# Altium PCB LED.PcbDoc
Units mm, origin at the board's own origin, x right, y up, seen from the top; angles counter-clockwise.
Board outline 20 x 20 mm, 2 copper layers (Top Layer, Bottom Layer), stack 1.671 mm thick; 5 components, 4 nets, 10 pads, 1 vias.
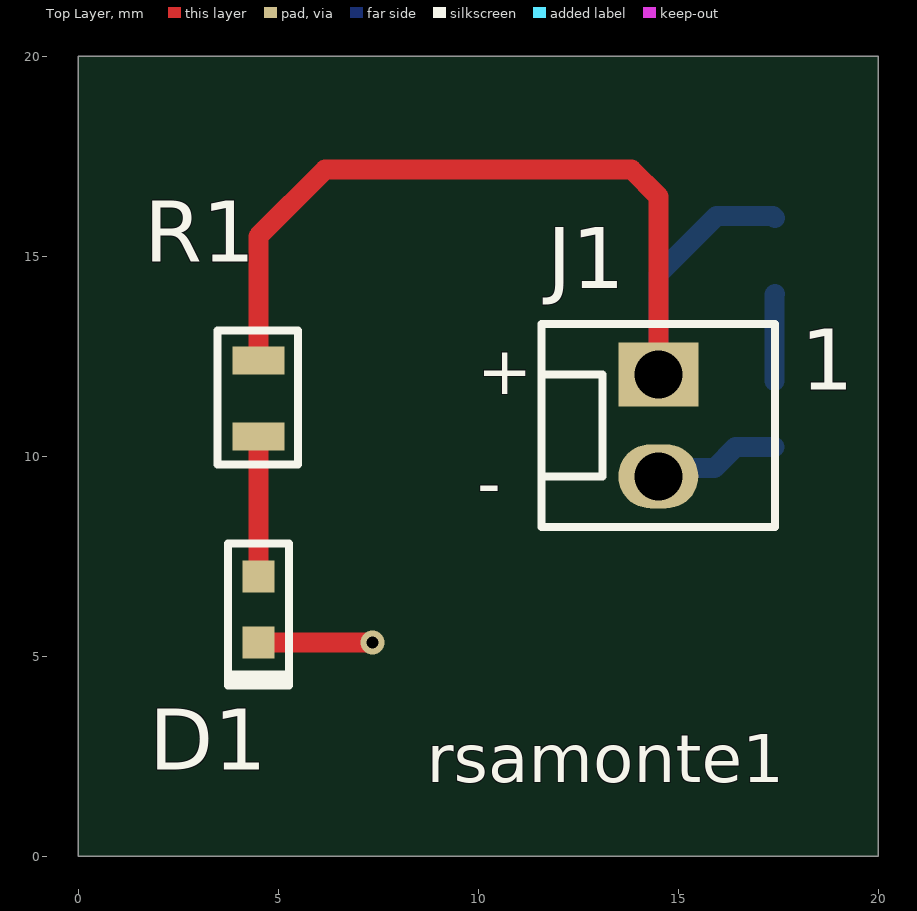
[diagram p0: Top Layer view]
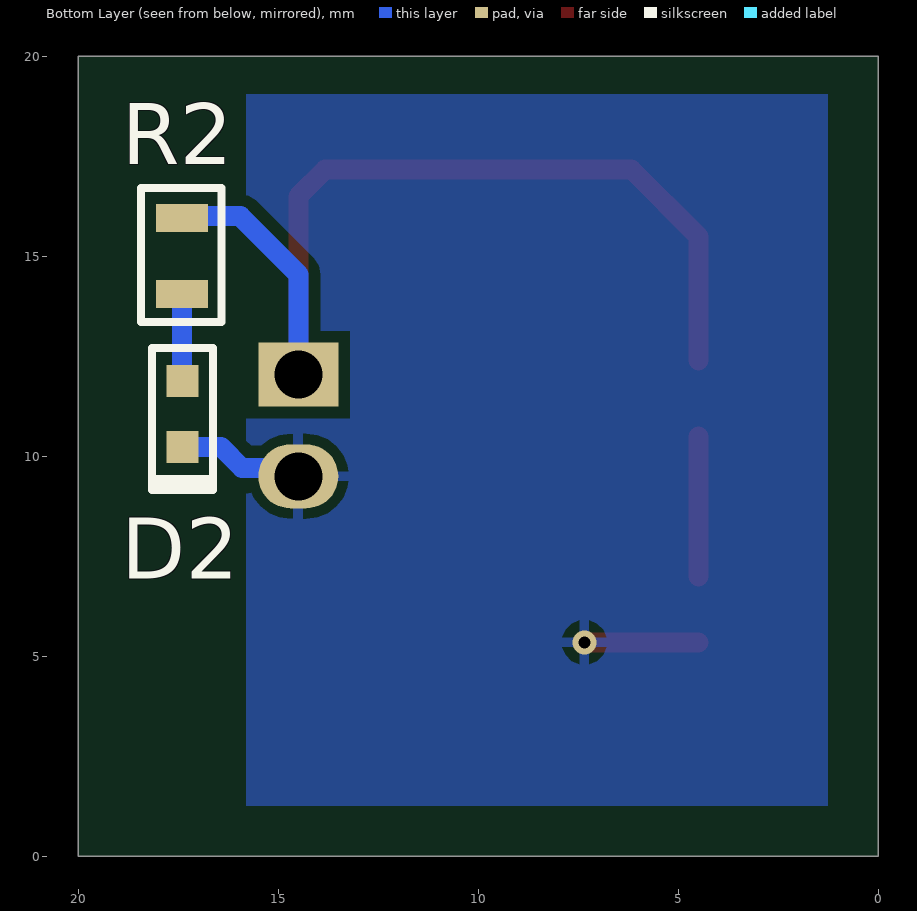
[diagram p1: Bottom Layer view, seen from below]
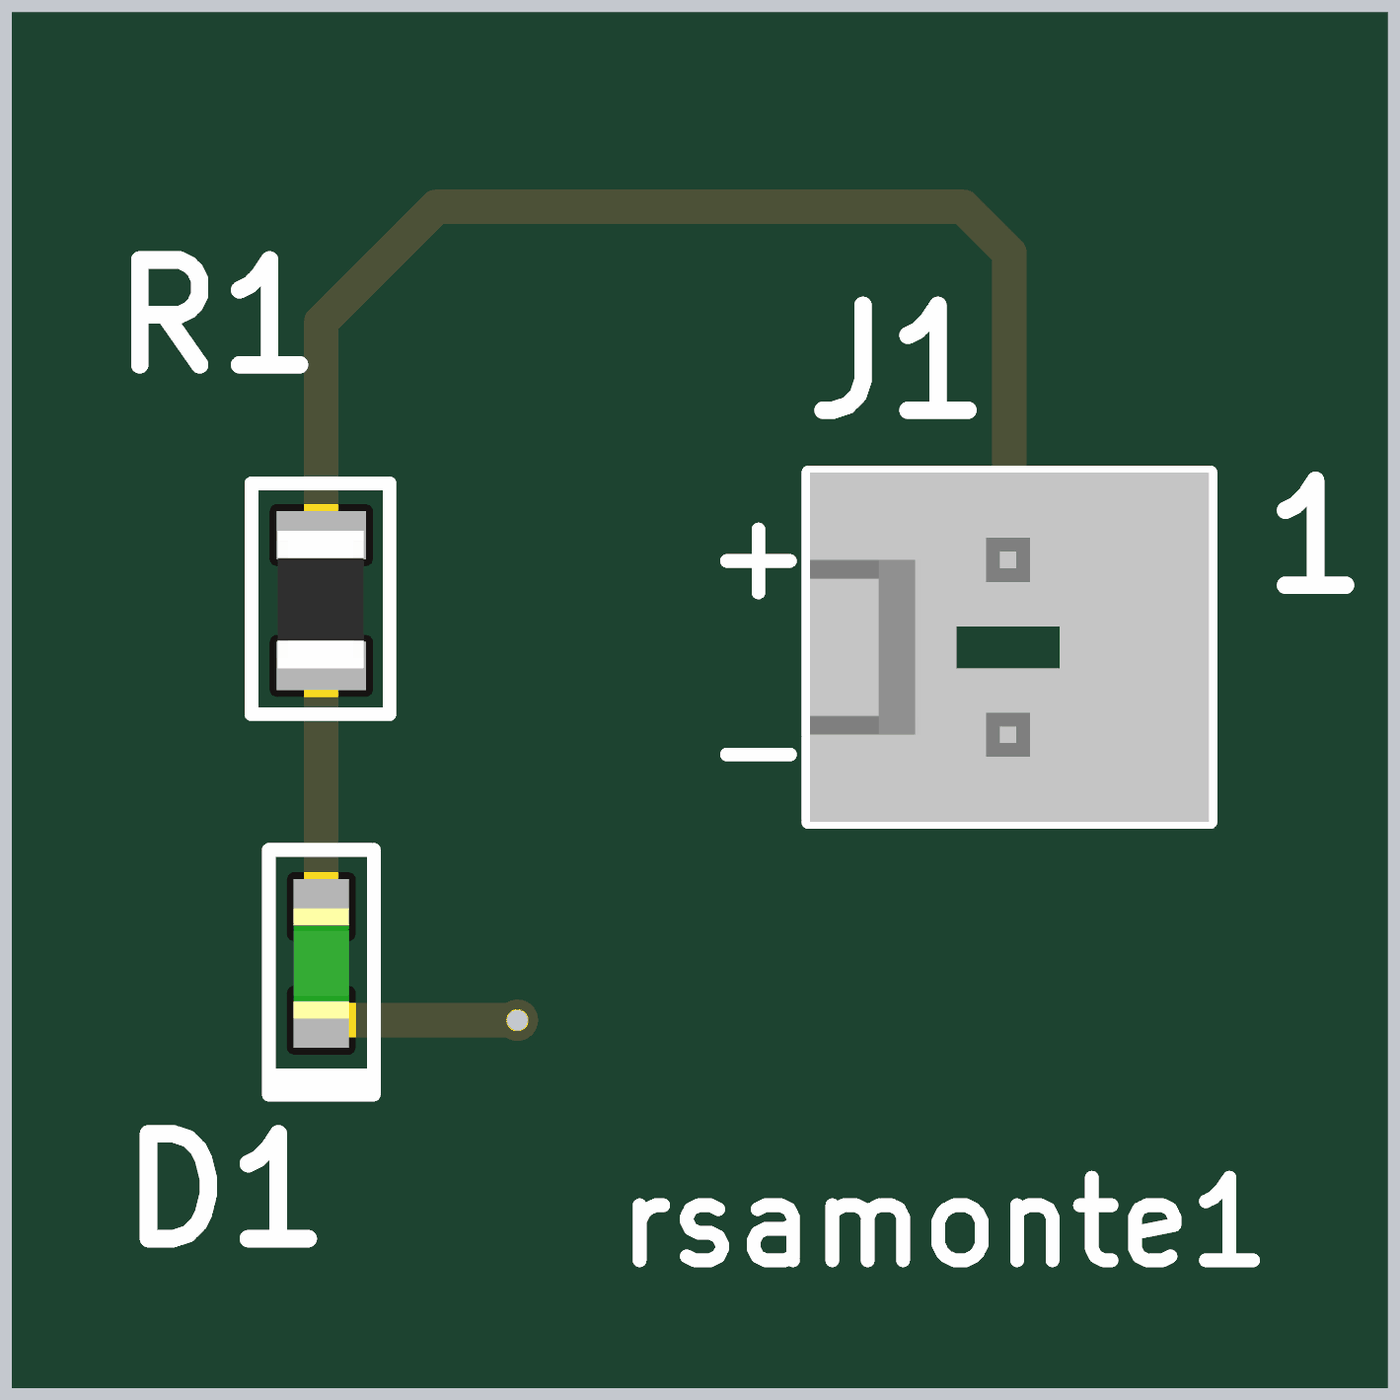
[diagram p2: 3D render of the assembled board from above, using the file's embedded part models]

## Layer stack, top to bottom
Top Solder: solder mask 0.0102, Solder Resist, Dk 3.5
Top Layer: signal copper 0.0356
Dielectric 1: dielectric 1.6, FR-4, Dk 4.8
Bottom Layer: signal copper 0.0356
Bottom Solder: solder mask 0.0102, Solder Resist, Dk 3.5

## Board outline
0,0 20,0 20,20 0,20

## Design rules (kind name [scope] priority, off if disabled: settings)
Clearance [All] p1: gap=0.3 ignorepadtopadclearanceinfootprint=FALSE
PolygonConnect [All] p1: connectstyle=Relief reliefconductorwidth=0.254 reliefentries=4 polygonreliefangle="90 Angle" airgapwidth=0.254
RoutingVias [All] p1: holewidth=0.3 width=0.6 viastyle="Through Hole" minholewidth=0.3 minwidth=0.6 maxholewidth=0.3 maxwidth=0.6
SilkToSolderMaskClearance [IsPad] p1: minsilkscreentomaskgap=0.1 clearancetoexposedcopper=TRUE
SolderMaskExpansion [All] p1: expansion=0.102 istentingtop=FALSE
Width [All] p1: maxlimit=1 minlimit=0.3 preferedwidth=0.5
29 further rules are at their usual default settings.

## Components (designator, comment, footprint, x,y, rotation, side; value= is the part's Value field where it differs from the comment)
D1 "Green" LED0603G 4.5,6.175 r90 top
D2 "Green" LED0603G 17.399,11.061 r90 bottom
J1 "1x2 Header" HEADER1X2 14.5,12.04 r0 top
R1 "360R" R0805 4.5,11.45 r90 top
R2 "360R" R0805 17.412,15.004 r90 bottom

## Footprints (in the part's own frame and the unit in brackets; to place one, negate y for a bottom-side part, rotate by r counter-clockwise, add the part's x,y. Pads: shape width x height; smd on the part's side, far side on the other; paste and mask are expansions set on the pad)
HEADER1X2 [mm]
  rect 2x1.6 hole 1.2: 1(0,0)
  oval 2x1.6 hole 1.2: 2(0,-2.54)
  silkscreen extent -2.92,-3.81 2.92,1.27, body extent -2.9,-3.81 2.9,1.27, height 11.07
LED0603G [mm]
  rect 0.8x0.8 smd: 1(-0.825,0) 2(0.825,0)
  silkscreen extent -1.91,-0.76 1.65,0.76, body extent -0.8,-0.4 0.8,0.4, height 0.4
R0805 [mm]
  rect 0.7x1.3 smd: 1(-0.95,0) 2(0.95,0)
  silkscreen extent -1.65,-0.99 1.7,1.02, body extent -0.98,-0.62 1.02,0.64, height 0.61

## Part data
D1 D2: library part APG1608CGKC/T, "APG1608CGKC/T Green LED; 570 nm 1608 (0603) Clear; Rectangle Lens SMD package", Case Code (Imperial)=0603, Case Code (Metric)=1608, Forward Current=30mA, Forward Voltage=2.1V, Lens Color=Colorless, Manufacturer=Kingbright, Max Operating Temperature=85°C, Min Operating Temperature=-40°C, Package Quantity=2000, Power Dissipation=78mW, Supplier Part Number 1=754-1357-1-ND, Test Current=20mA, Case/Package=0603, Category=LEDs, Color=Green, ComponentLink1Description=https://datasheet.ciiva.com/4689/apg1608cgkc-t-76846-4689371.pdf?src-supplier=Mouser, ComponentLink1URL=https://datasheet.ciiva.com/4689/apg1608cgkc-t-76846-4689371.pdf?src-supplier=Mouser, ComponentLink2Description=https://datasheet.ciiva.com/16223/apg1608cgkc-t-16223186.pdf?src-supplier=Future+Electronics, ComponentLink2URL=https://datasheet.ciiva.com/16223/apg1608cgkc-t-16223186.pdf?src-supplier=Future+Electronics, ComponentLink3Description=https://datasheet.ciiva.com/2113/apg1608cgkc-t-2113933.pdf?src-supplier=Digi-Key, ComponentLink3URL=https://datasheet.ciiva.com/2113/apg1608cgkc-t-2113933.pdf?src-supplier=Digi-Key, ComponentLink4Description=https://datasheet.ciiva.com/2113/apg1608cgkc-t-2113934.pdf?src-supplier=Digi-Key, ComponentLink4URL=https://datasheet.ciiva.com/2113/apg1608cgkc-t-2113934.pdf?src-supplier=Digi-Key, ComponentLink5Description=https://datasheet.ciiva.com/2113/apg1608cgkc-t-2113935.pdf?src-supplier=Digi-Key, ComponentLink5URL=https://datasheet.ciiva.com/2113/apg1608cgkc-t-2113935.pdf?src-supplier=Digi-Key, ComponentLink6Description=https://datasheet.ciiva.com/14604/70062819-14604010.pdf?src-supplier=Allied+Electronics, ComponentLink6URL=https://datasheet.ciiva.com/14604/70062819-14604010.pdf?src-supplier=Allied+Electronics, Dominant Wavelength=570nm, Height=0.28mm, Illumination Color=Green, Lead Free="Lead Free", Length=1.6mm, Lens Style=Clear, Lens Transparency=Clear, Luminous Intensity=50mcd, Manufacturer Part Number=APG1608CGKC/T, Number of LEDs=1, Number of Pins=2, Packaging="Tape and Reel", Parameter 1=Optoelectronic, Power Rating=78mW, Pricing 1="1=0.36000, 10=0.28500, 100=0.12820, 500=0.11576, 1000=0.09508, 2000=0.08268 (USD)", RoHS=Yes, RoHS Compliant=Yes, Series=-, Stock 1=146808, Supplier 1=Digi-Key, Viewing Angle=120°, Width=0.8mm
J1: library part 22-29-2021, "KK 254 Wire-to-Board Header, Vertical, with Friction Lock, 2 Circuits, Gold (Au) Plating", Color=White, Flammability Rating="UL94 V-0", Housing Color=Natural, Manufacturer=Molex, Max Operating Temperature=80°C, Package Quantity=24000, Supplier Part Number 1=WM2744-ND, Voltage Rating (DC)=250V, Category="Headers and Wire Housings", ComponentLink1Description=https://datasheet.ciiva.com/70131/022292021-sd-70131706.pdf?src-supplier=Digi-Key, ComponentLink1URL=https://datasheet.ciiva.com/70131/022292021-sd-70131706.pdf?src-supplier=Digi-Key, Connector Type="Header,Male Pin", Contact Material=Tin, Contact Mating Length=0.295inch, Contact Plating=Gold, Contact Post Length=0.14inch, Contact Shape=Square, Contact Type=-, Fastening Type=Friction, Gender=Male, Glow Wire Compliant=Non-compliant, Halogen Free="Low Halogen", Insulation Color=Natural, Insulation Height=0.461inch, Insulation Material=Nylon, Lead Free="Lead Free", Manufacturer Part Number=22-29-2021, Mount="Through Hole", Number of Positions=2, Number of Rows=1, Packaging=Bulk, Parameter 1=Connector, Pricing 1="1=0.48000, 10=0.40400, 100=0.31400, 1000=0.24671, 5000=0.21680, 10000=0.20185 (USD)", RoHS=Yes, Series=6410, Stock 1=4686, Supplier 1=Digi-Key, Termination="Through Hole"
R1 R2: library part CRCW080536R0FKEA, "Res Thick Film 0805 36 Ohm 1% 1/8W ±100ppm/°C Molded SMD SMD Paper T/R", Case Code (Imperial)=0805, Case Code (Metric)=2012, Manufacturer=Vishay, Max Operating Temperature=155°C, Max Power Dissipation=125mW, Min Operating Temperature=-55°C, Package Quantity=5000, Resistance=36R, Resistor Type="Thick Film", Supplier Part Number 1=541-36.0CCT-ND, Temperature Coefficient=100ppm/°C, Tolerance=1%, Voltage Rating=150V, Case/Package=0805, Category="Chip SMD Resistors", ComponentLink1Description=https://datasheet.ciiva.com/5550/dcrcwe3-109170-5550495.pdf?src-supplier=Mouser, ComponentLink1URL=https://datasheet.ciiva.com/5550/dcrcwe3-109170-5550495.pdf?src-supplier=Mouser, ComponentLink2Description=https://datasheet.ciiva.com/5936/1697337-5936166.pdf?src-supplier=Farnell, ComponentLink2URL=https://datasheet.ciiva.com/5936/1697337-5936166.pdf?src-supplier=Farnell, ComponentLink3Description=https://datasheet.ciiva.com/9013/dcrcwe3-9013853.pdf?src-supplier=Avnet, ComponentLink3URL=https://datasheet.ciiva.com/9013/dcrcwe3-9013853.pdf?src-supplier=Avnet, ComponentLink4Description=https://datasheet.ciiva.com/2467/dcrcwe3-2467497.pdf?src-supplier=Digi-Key, ComponentLink4URL=https://datasheet.ciiva.com/2467/dcrcwe3-2467497.pdf?src-supplier=Digi-Key, ComponentLink5Description=https://datasheet.ciiva.com/2467/dcrcwe3-2467498.pdf?src-supplier=Digi-Key, ComponentLink5URL=https://datasheet.ciiva.com/2467/dcrcwe3-2467498.pdf?src-supplier=Digi-Key, ComponentLink6Description=https://datasheet.ciiva.com/2467/dcrcwe3-2467499.pdf?src-supplier=Digi-Key, ComponentLink6URL=https://datasheet.ciiva.com/2467/dcrcwe3-2467499.pdf?src-supplier=Digi-Key, ComponentLink7Description=https://datasheet.ciiva.com/26316/fld-crcw-e3-data-en-26316527.pdf?src-supplier=Distrelec, ComponentLink7URL=https://datasheet.ciiva.com/26316/fld-crcw-e3-data-en-26316527.pdf?src-supplier=Distrelec, ComponentLink8Description=https://datasheet.ciiva.com/22674/1912744-22674873.pdf?src-supplier=Element14, ComponentLink8URL=https://datasheet.ciiva.com/22674/1912744-22674873.pdf?src-supplier=Element14, ComponentLink9Description=https://datasheet.ciiva.com/22705/1697337-22705578.pdf?src-supplier=Element14, ComponentLink9URL=https://datasheet.ciiva.com/22705/1697337-22705578.pdf?src-supplier=Element14, Contact Plating=Tin, Depth=1.25mm, Features="Automotive AEC-Q200", Height=0.45mm, Lead Free="Lead Free", Length=2mm, Manufacturer Part Number=CRCW080536R0FKEA, Military Standard=Not, Number of Pins=2, Number of Terminations=2, Packaging="Cut Tape", Parameter 1=Resistors, Power Rating=125mW, Pricing 1="1=0.10000, 10=0.06700, 100=0.02710, 1000=0.01219, 2500=0.01058 (USD)", REACH SVHC=Unknown, RoHS=Yes, RoHS Compliant=Yes, Series="D/CRCW E3", Stock 1=9532, Supplier 1=Digi-Key, Technology="THICK FILM", Termination=SMD/SMT, Voltage Rating (DC)=150V, Weight=0.000194oz, Width=1.25mm

## Via types
v1: diameter 0.6, hole 0.3, Top Layer to Bottom Layer, tented both sides, 1 vias

## Nets (pads, with @x,y where several pads share a name; then routed paths per layer and width w, separated by ;. In a path a pad name is that pad's centre, name@x,y a point inside that pad or via, vN(x,y) a via of type N, cw(c..) or ccw(c..) an arc to the next point about the centre after c; other vN are vias at no path point)
+3V3: J1.1 R1.2 R2.2 | length 24.6
  Top Layer w0.5: R1.2 4.5,15.5 6.17,17.17 13.83,17.17 14.5,16.5 J1.1
  Bottom Layer w0.5: J1.1 14.5,14.551 15.951,16.002 17.363,16.002 R2.2
DIODE1: D1.2 R1.1 | length 3.5
  Top Layer w0.5: D1.2 R1.1
DIODE2: D2.2 R2.1 | length 2.2
  Bottom Layer w0.5: D2.2 17.405,11.893 17.405,14.047 R2.1
GND: D1.1 D2.1 J1.2 | length 6.1
  Top Layer w0.5: D1.1 v1(7.35,5.35) v1@7.366,5.334
  Bottom Layer w0.5: J1.2 14.71,9.71 15.908,9.71 16.434,10.236 D2.1

## Polygon pours and split planes (outlines as drawn)
GND on Bottom Layer "GND_L02_P000" (solid, pour order 0): 1.27,1.27 15.799,1.27 15.799,19.05 1.27,19.05

## Silkscreen, mask and mechanical layers (free items; w line width, h text height)
Top Overlay:
  text "+" at 9.979,11.557 h1.2
  text "-" at 9.979,8.744 h1.2
  text "rsamonte1" at 8.709,1.851 h1.2
Board Outline:
  lines w0.1: 0,0 0,19.99 19.99,19.99 19.99,0.025 19.964,0 0,0

## Text inside footprints (layer, text, board x,y; h text height)
J1: Top Overlay "1" at 18.056,11.659 h1.52